# EAGLE board 8x8_328 (EAGLE 6.6.0)
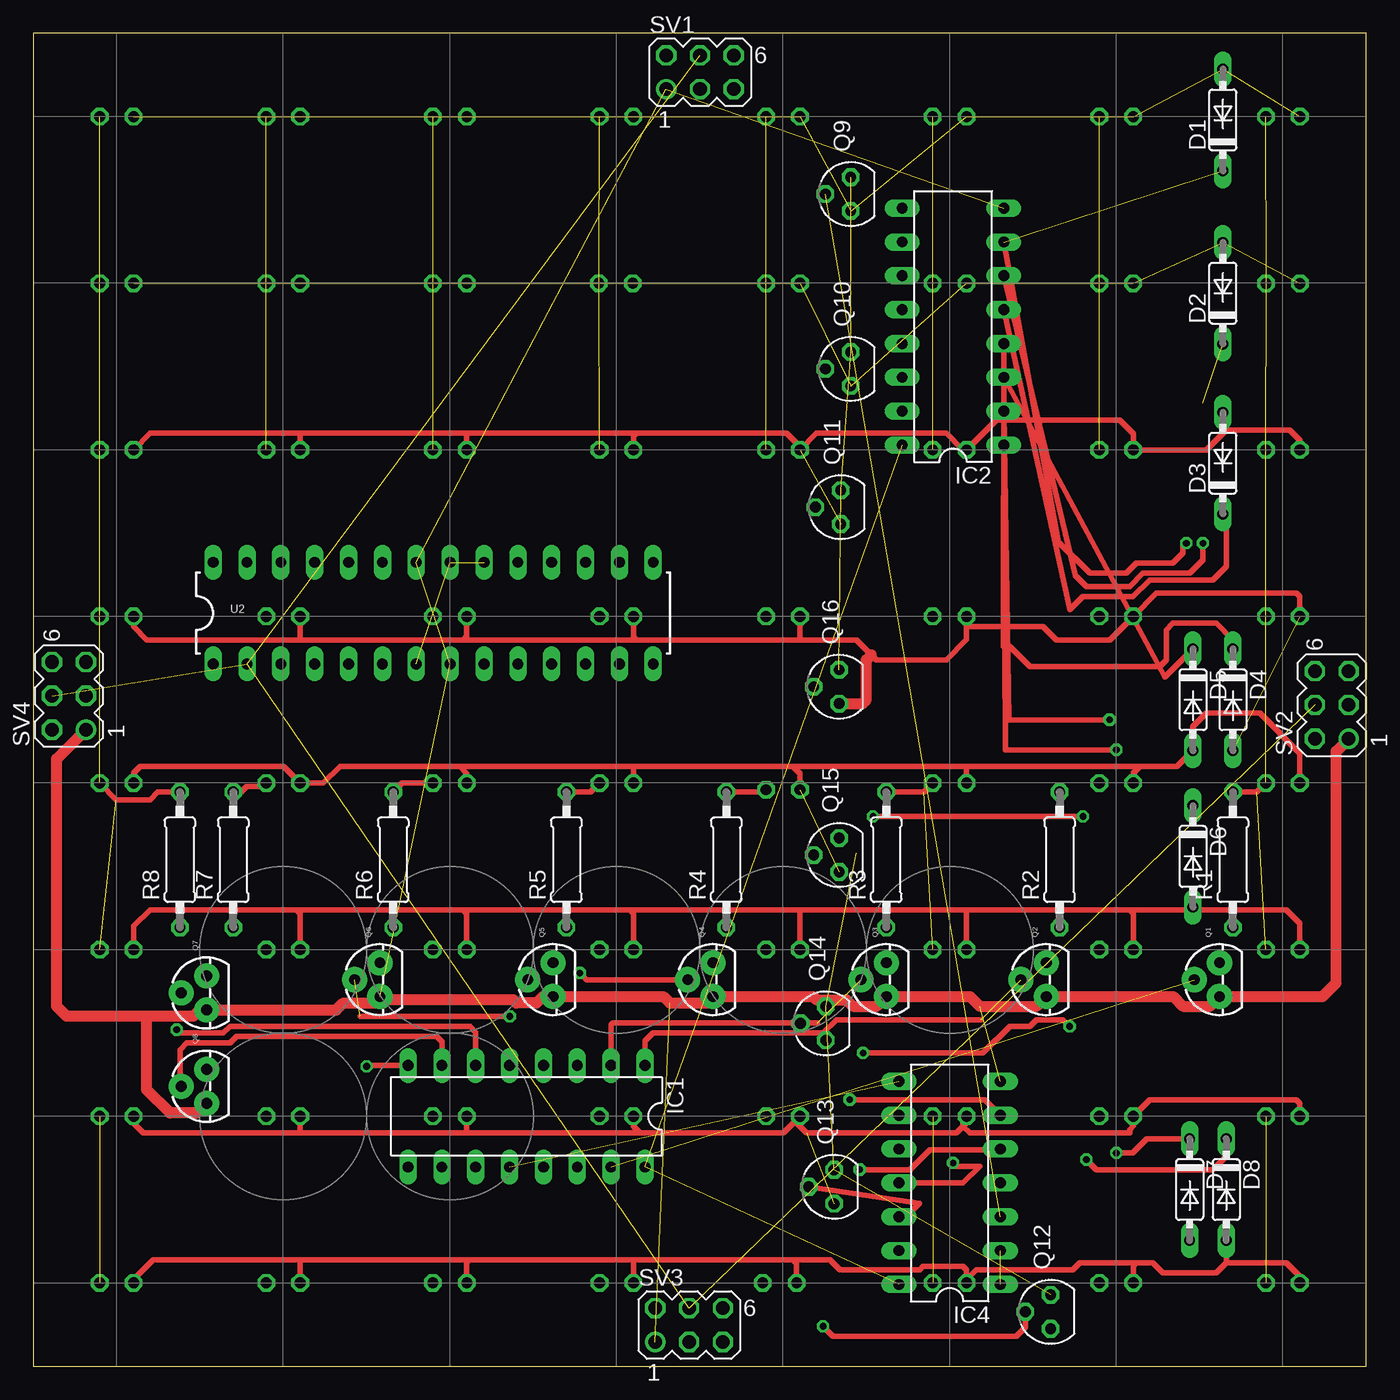
[diagram p0: board, top side]
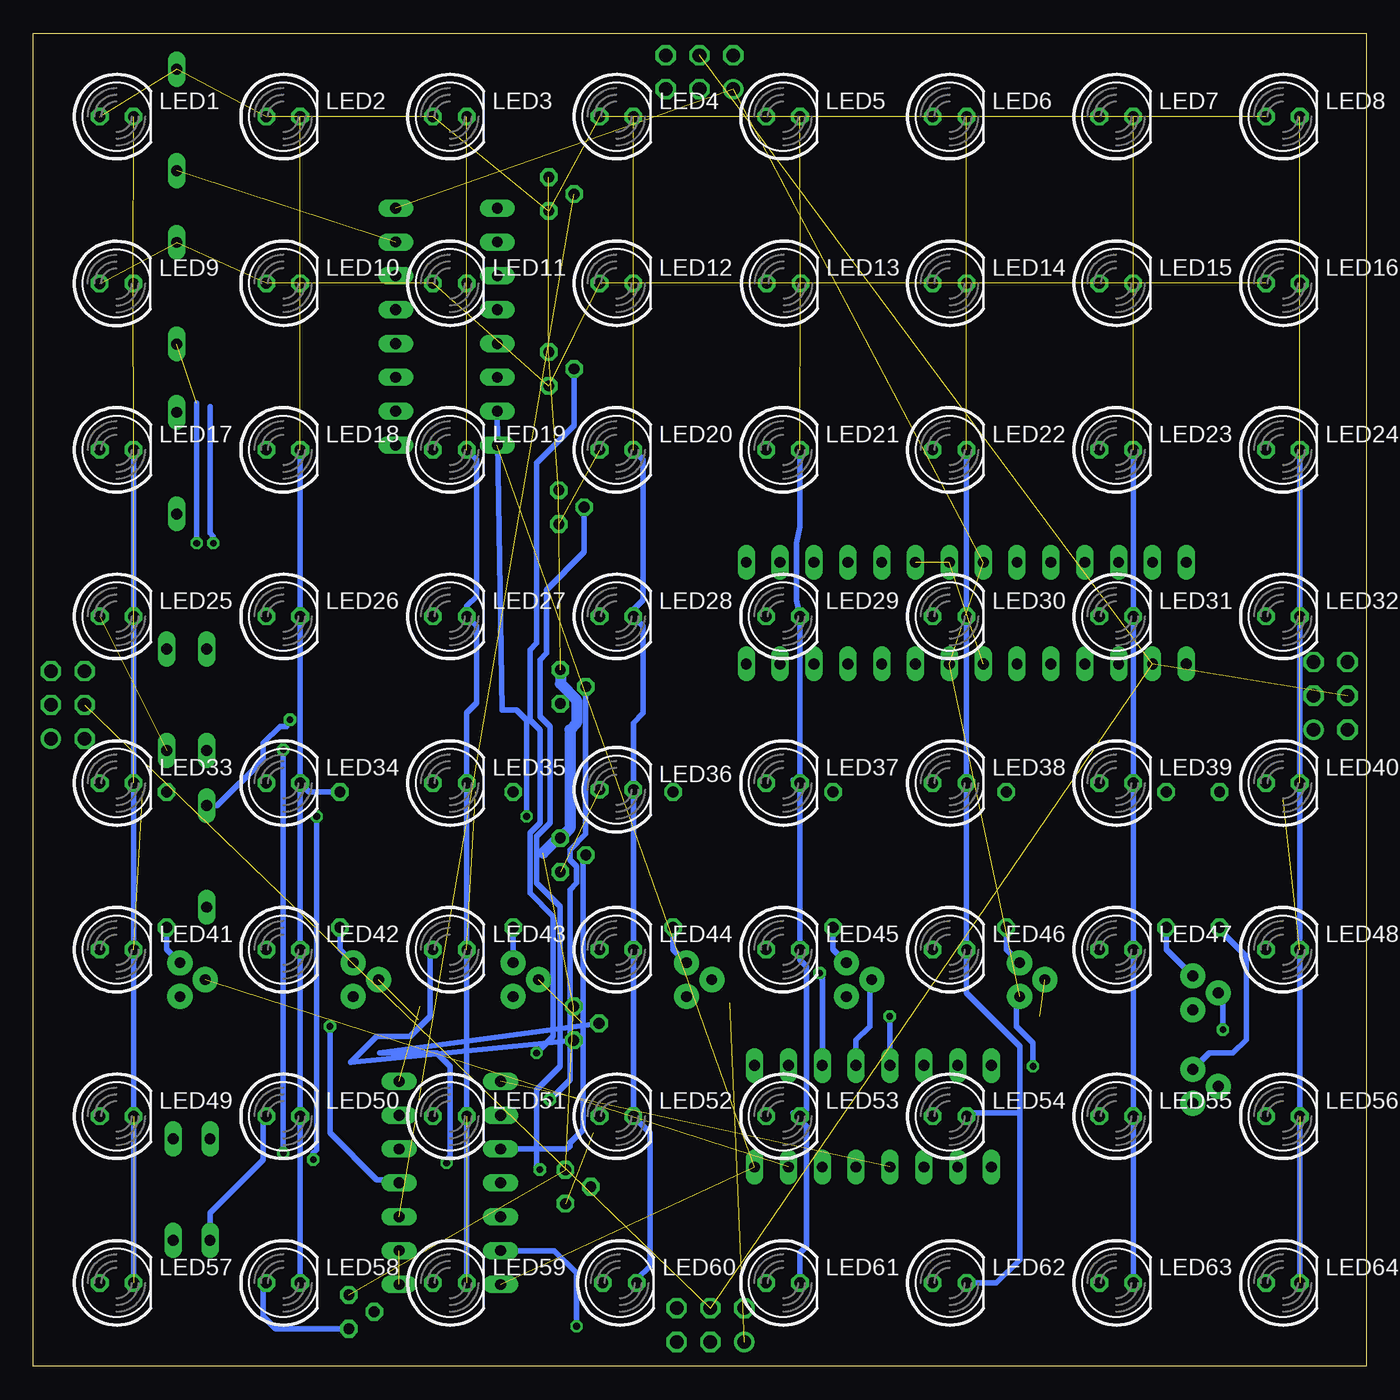
[diagram p1: board, bottom side, seen from below]

Size 100 x 100 mm. Coordinates in mm from the lower left corner, seen from the top.
Outline: 0,0 100,0 100,100 0,100 0,0
Copper layers (1*16): Top 0.035mm / dielectric 1.5mm / Bottom 0.035mm
Design rules "default": minimum track width 10mil, minimum drill 24mil, track to track 8mil, track to pad 8mil, pad to pad 8mil, via to via 8mil, smd to smd 8mil, copper to edge 40mil, drill to drill 8mil, minimum pad ring 10mil, minimum via ring 8mil, stop-mask expansion 4mil, vias tented up to drill 0mil, thermal gap 10mil

## Footprints (pad centres in the part's own frame; a part is rotated, then mirrored left to right if it is on the bottom)
DO35-7 = drill 0.813 long: A 3.81,0; C -3.81,0
DIL16 = drill 0.813 long: 1 -8.89,-3.81; 2 -6.35,-3.81; 3 -3.81,-3.81; 4 -1.27,-3.81; 5 1.27,-3.81; 6 3.81,-3.81; 7 6.35,-3.81; 8 8.89,-3.81; 9 8.89,3.81; 10 6.35,3.81; 11 3.81,3.81; 12 1.27,3.81; 13 -1.27,3.81; 14 -3.81,3.81; 15 -6.35,3.81; 16 -8.89,3.81
DIL14 = drill 0.813 long: 1 -7.62,-3.81; 2 -5.08,-3.81; 3 -2.54,-3.81; 4 0,-3.81; 5 2.54,-3.81; 6 5.08,-3.81; 7 7.62,-3.81; 8 7.62,3.81; 9 5.08,3.81; 10 2.54,3.81; 11 0,3.81; 12 -2.54,3.81; 13 -5.08,3.81; 14 -7.62,3.81
LED5MM = drill 0.813 octagon: A -1.27,0; K 1.27,0
TO-92 = drill 0.813 pad 1.88: 1 -1.27,0; 2 0,1.905; 3 1.27,0
SOT54E = drill 0.813 octagon: D -1.27,0; G 0,1.905; S 1.27,0
0207/10 = drill 0.813 octagon: 1 -5.08,0; 2 5.08,0
MA03-2 = drill 1.016: 1 -2.54,-1.27 | drill 1.016 octagon: 2 -2.54,1.27; 3 0,-1.27; 4 0,1.27; 5 2.54,-1.27; 6 2.54,1.27
DIL28-3 = drill 0.813 long: 1 -16.51,-3.81; 2 -13.97,-3.81; 3 -11.43,-3.81; 4 -8.89,-3.81; 5 -6.35,-3.81; 6 -3.81,-3.81; 7 -1.27,-3.81; 8 1.27,-3.81; 9 3.81,-3.81; 10 6.35,-3.81; 11 8.89,-3.81; 12 11.43,-3.81; 13 13.97,-3.81; 14 16.51,-3.81; 15 16.51,3.81; 16 13.97,3.81; 17 11.43,3.81; 18 8.89,3.81; 19 6.35,3.81; 20 3.81,3.81; 21 1.27,3.81; 22 -1.27,3.81; 23 -3.81,3.81; 24 -6.35,3.81; 25 -8.89,3.81; 26 -11.43,3.81; 27 -13.97,3.81; 28 -16.51,3.81

## Placement (x,y rotation side)
D1  1N4148DO35-7  [DO35-7]  89.25,93.5 90 top
D2  1N4148DO35-7  [DO35-7]  89.25,80.5 90 top
D3  1N4148DO35-7  [DO35-7]  89.25,67.75 90 top
D4  1N4148DO35-7  [DO35-7]  90,50 270 top
D5  1N4148DO35-7  [DO35-7]  87,50 270 top
D6  1N4148DO35-7  [DO35-7]  87,38.25 270 top
D7  1N4148DO35-7  [DO35-7]  86.75,13.25 270 top
D8  1N4148DO35-7  [DO35-7]  89.5,13.25 270 top
IC1  74HC595N  [DIL16]  37,18.75 180 top
IC2  74HC595N  [DIL16]  69,78 90 top
IC4  74AC164N  [DIL14]  68.75,13.75 90 top
LED1  [LED5MM]  93.75,93.75 0 bottom
LED2  [LED5MM]  81.25,93.75 0 bottom
LED3  [LED5MM]  68.75,93.75 0 bottom
LED4  [LED5MM]  56.25,93.75 0 bottom
LED5  [LED5MM]  43.75,93.75 0 bottom
LED6  [LED5MM]  31.25,93.75 0 bottom
LED7  [LED5MM]  18.75,93.75 0 bottom
LED8  [LED5MM]  6.25,93.75 0 bottom
LED9  [LED5MM]  93.76,81.23 0 bottom
LED10  [LED5MM]  81.25,81.25 0 bottom
LED11  [LED5MM]  68.75,81.25 0 bottom
LED12  [LED5MM]  56.25,81.25 0 bottom
LED13  [LED5MM]  43.7,81.25 0 bottom
LED14  [LED5MM]  31.25,81.25 0 bottom
LED15  [LED5MM]  18.75,81.25 0 bottom
LED16  [LED5MM]  6.25,81.25 0 bottom
LED17  [LED5MM]  93.75,68.75 0 bottom
LED18  [LED5MM]  81.25,68.75 0 bottom
LED19  [LED5MM]  68.75,68.75 0 bottom
LED20  [LED5MM]  56.25,68.75 0 bottom
LED21  [LED5MM]  43.75,68.75 0 bottom
LED22  [LED5MM]  31.25,68.75 0 bottom
LED23  [LED5MM]  18.75,68.75 0 bottom
LED24  [LED5MM]  6.25,68.75 0 bottom
LED25  [LED5MM]  93.75,56.25 0 bottom
LED26  [LED5MM]  81.25,56.25 0 bottom
LED27  [LED5MM]  68.75,56.25 0 bottom
LED28  [LED5MM]  56.25,56.25 0 bottom
LED29  [LED5MM]  43.75,56.25 0 bottom
LED30  [LED5MM]  31.25,56.25 0 bottom
LED31  [LED5MM]  18.75,56.25 0 bottom
LED32  [LED5MM]  6.25,56.25 0 bottom
LED33  [LED5MM]  93.75,43.75 0 bottom
LED34  [LED5MM]  81.25,43.75 0 bottom
LED35  [LED5MM]  68.75,43.75 0 bottom
LED36  [LED5MM]  56.25,43.25 0 bottom
LED37  [LED5MM]  43.75,43.75 0 bottom
LED38  [LED5MM]  31.25,43.75 0 bottom
LED39  [LED5MM]  18.75,43.75 0 bottom
LED40  [LED5MM]  6.25,43.75 0 bottom
LED41  [LED5MM]  93.75,31.25 0 bottom
LED42  [LED5MM]  81.25,31.25 0 bottom
LED43  [LED5MM]  68.75,31.25 0 bottom
LED44  [LED5MM]  56.25,31.25 0 bottom
LED45  [LED5MM]  43.75,31.25 0 bottom
LED46  [LED5MM]  31.25,31.25 0 bottom
LED47  [LED5MM]  18.75,31.25 0 bottom
LED48  [LED5MM]  6.25,31.25 0 bottom
LED49  [LED5MM]  93.75,18.75 0 bottom
LED50  [LED5MM]  81.25,18.75 0 bottom
LED51  [LED5MM]  68.75,18.75 0 bottom
LED52  [LED5MM]  56.25,18.75 0 bottom
LED53  [LED5MM]  43.75,18.75 0 bottom
LED54  [LED5MM]  31.25,18.75 0 bottom
LED55  [LED5MM]  18.75,18.75 0 bottom
LED56  [LED5MM]  6.25,18.75 0 bottom
LED57  [LED5MM]  93.75,6.25 0 bottom
LED58  [LED5MM]  81.25,6.25 0 bottom
LED59  [LED5MM]  68.75,6.25 0 bottom
LED60  [LED5MM]  56,6.25 0 bottom
LED61  [LED5MM]  43.75,6.25 0 bottom
LED62  [LED5MM]  31.25,6.25 0 bottom
LED63  [LED5MM]  18.75,6.25 0 bottom
LED64  [LED5MM]  6.25,6.25 0 bottom
Q1  MOSFET-NCHANNEL2N7000  [TO-92]  89,29 90 top
Q2  MOSFET-NCHANNEL2N7000  [TO-92]  76,29 90 top
Q3  MOSFET-NCHANNEL2N7000  [TO-92]  64,29 90 top
Q4  MOSFET-NCHANNEL2N7000  [TO-92]  51,29 90 top
Q5  MOSFET-NCHANNEL2N7000  [TO-92]  39,29 90 top
Q6  MOSFET-NCHANNEL2N7000  [TO-92]  26,29 90 top
Q7  MOSFET-NCHANNEL2N7000  [TO-92]  13,28 90 top
Q8  MOSFET-NCHANNEL2N7000  [TO-92]  13,21 90 top
Q9  BS250  [SOT54E]  61.33,87.94 90 top
Q10  BS250  [SOT54E]  61.33,74.82 90 top
Q11  BS250  [SOT54E]  60.58,64.45 90 top
Q12  BS250  [SOT54E]  76.33,4.08 90 top
Q13  BS250  [SOT54E]  60.08,13.46 90 top
Q14  BS250  [SOT54E]  59.46,25.72 90 top
Q15  BS250  [SOT54E]  60.46,38.35 90 top
Q16  BS250  [SOT54E]  60.46,50.98 90 top
R1  [0207/10]  90,38 90 top
R2  [0207/10]  77,38 90 top
R3  [0207/10]  64,38 90 top
R4  [0207/10]  52,38 90 top
R5  [0207/10]  40,38 90 top
R6  [0207/10]  27,38 90 top
R7  [0207/10]  15,38 90 top
R8  [0207/10]  11,38 90 top
SV1  [MA03-2]  50.02,97.08 0 top
SV2  [MA03-2]  97.42,49.61 90 top
SV3  [MA03-2]  49.2,3.08 0 top
SV4  [MA03-2]  2.67,50.29 90 top
U2  ATMEGA328P_PDIP  [DIL28-3]  30,56.5 0 top

## Library data of the parts
D1-D8 = diode
IC1 IC2 IC4 = 74xx-eu
LED1-LED64 = dtb
Q1-Q8 = SparkFun-DiscreteSemi
Q9-Q16 = transistor-small-signal
R1-R8 = resistor
SV1-SV4 = con-lstb; OC_FARNELL: unknown; OC_NEWARK: unknown
U2 = SparkFun-DigitalIC

## Nets
CFET1: IC1.15 Q1.2
CFET2: IC1.1 Q2.2
CFET3: IC1.2 Q3.2
CFET4: IC1.3 Q4.2
CFET5: IC1.4 Q5.2
CFET6: IC1.5 Q6.2
CFET7: IC1.6 Q7.2
CFET8: IC1.7 Q8.2
COL1: LED1.K LED9.K LED17.K LED25.K LED33.K LED41.K LED49.K LED57.K R1.2
COL2: LED2.K LED10.K LED18.K LED26.K LED34.K LED42.K LED50.K LED58.K R2.2
COL3: LED3.K LED11.K LED19.K LED27.K LED35.K LED43.K LED51.K LED59.K R3.2
COL4: LED4.K LED12.K LED20.K LED28.K LED36.K LED44.K LED52.K LED60.K R4.2
COL5: LED5.K LED13.K LED21.K LED29.K LED37.K LED45.K LED53.K LED61.K R5.2
COL6: LED6.K LED14.K LED22.K LED30.K LED38.K LED46.K LED54.K LED62.K R6.2
COL7: LED7.K LED15.K LED23.K LED31.K LED39.K LED47.K LED55.K LED63.K R7.2
COL8: LED8.K LED16.K LED24.K LED32.K LED40.K LED48.K LED56.K LED64.K R8.2
COMMS_DOWN: SV3.3
COMMS_LEFT: SV4.3
COMMS_RIGHT: SV2.3
COMMS_UP: SV1.3
G_UART: SV1.4 SV2.4 SV3.4 SV4.4 U2.2
GND: IC1.8 IC2.8 IC4.7 Q1.1 Q2.1 Q3.1 Q4.1 Q5.1 Q6.1 Q7.1 Q8.1 SV1.1 SV2.1 SV3.1 SV4.1 U2.8 U2.22
N$1: Q8.3 R8.1
N$2: Q7.3 R7.1
N$3: Q6.3 R6.1
N$4: Q5.3 R5.1
N$5: Q4.3 R4.1
N$6: Q3.3 R3.1
N$7: Q2.3 R2.1
N$8: Q1.3 R1.1
N$9: IC1.12 IC4.8
N$10: IC4.1 IC4.2
N$11: IC2.14
N$12: IC2.11
N$13: IC1.14
N$14: D1.C IC2.7
N$15: IC1.11
N$16: U2.7 U2.20 U2.21
N$20: D8.C IC2.15
N$21: D7.C IC2.1
N$22: D6.C IC2.2
N$23: D5.C IC2.3
N$24: D4.C IC2.4
N$25: D3.C IC2.5
N$26: D2.C IC2.6
N$29: Q9.S Q10.S Q11.S Q12.S Q13.S Q14.S Q15.S Q16.S
RFET1: IC4.3 Q9.G
RFET2: IC4.4 Q10.G
RFET3: IC4.5 Q11.G
RFET4: IC4.6 Q16.G
RFET5: IC4.10 Q15.G
RFET6: IC4.11 Q14.G
RFET7: IC4.12 Q13.G
RFET8: IC4.13 Q12.G
ROW1: D1.A LED1.A LED2.A LED3.A LED4.A LED5.A LED6.A LED7.A LED8.A Q9.D
ROW2: D2.A LED9.A LED10.A LED11.A LED12.A LED13.A LED14.A LED15.A LED16.A Q10.D
ROW3: D3.A LED17.A LED18.A LED19.A LED20.A LED21.A LED22.A LED23.A LED24.A Q11.D
ROW4: D4.A LED25.A LED26.A LED27.A LED28.A LED29.A LED30.A LED31.A LED32.A Q16.D
ROW5: D5.A LED33.A LED34.A LED35.A LED36.A LED37.A LED38.A LED39.A LED40.A Q15.D
ROW6: D6.A LED41.A LED42.A LED43.A LED44.A LED45.A LED46.A LED47.A LED48.A Q14.D
ROW7: D7.A LED49.A LED50.A LED51.A LED52.A LED53.A LED54.A LED55.A LED56.A Q13.D
ROW8: D8.A LED57.A LED58.A LED59.A LED60.A LED61.A LED62.A LED63.A LED64.A Q12.D
SHIFT_LEFT: SV4.5
SHIFT_RIGHT: SV2.5
VCC: IC1.16 IC2.16 IC4.14

## Tracks (layer width: path | path; a pad name or v marks a point on that pad's centre or on a via)
CFET1  (1 unrouted)
CFET2  (1 unrouted)
  Top 0.406: IC1.1 45.89,24.39 46.5,25 59.25,25 60.25,26 71.09,26
CFET3  (1 unrouted)
  Top 0.406: IC1.2 43.35,25.6 43.5,25.75 58.84,25.75
CFET4  (via drill 0.5)
  Top 0.406: Q4.2 41.5,29 v41,29.5
  Bottom 0.406: IC1.3 40.81,29 | 40.81,29 40.81,29.31 v41,29.5 41,29.19 40.81,29
CFET5
  Bottom 0.406: IC1.4 38.27,24.48 37.25,25.5 37.25,28.84 Q5.2
CFET6  (via drill 0.5)  (1 unrouted)
  Top 0.406: 24.5,26.25 v35.75,26.25
  Bottom 0.406: v35.75,26.25 35.75,22.58 IC1.5
CFET7  (via drill 0.5)
  Top 0.406: IC1.6 33.19,25.06 32.75,25.5 14.75,25.5 14.25,25 11,25 v10.75,25.25
  Bottom 0.406: v10.75,25.25 10.75,27.66 Q7.2
CFET8
  Top 0.406: IC1.7 30.65,24.35 30.25,24.75 15.25,24.75 14.75,24.25 11.5,24.25 11,23.75 11,21.09 Q8.2
COL1  (6 unrouted)
  Top 0.406: R1.2 91.81,43.08 LED33.K
  Bottom 0.406: LED57.K LED17.K
COL2  (2 unrouted)
  Bottom 0.406: LED18.K LED26.K LED34.K | LED34.K LED42.K | LED58.K LED50.K LED42.K | R2.2 79.31,43.08 LED34.K | LED34.K 79.98,43.98 80,44 80,31.27 LED42.K
COL3  (4 unrouted)
  Top 0.406: R3.2 66.81,43.08 LED35.K
  Bottom 0.406: LED59.K LED35.K 67.48,49.02 66.75,49.75 66.75,55.52 LED27.K 67.48,57.02 66.75,57.75 66.75,68.02 LED19.K
COL4  (2 unrouted)
  Top 0.406: R4.2 54.81,43.08 LED36.K
  Bottom 0.406: LED60.K 54.73,6.52 53.75,7.5 53.75,17.52 LED52.K LED44.K LED36.K 54.98,48.27 54.25,49 54.25,55.52 LED28.K 54.98,56.77 54.25,57.5 54.25,68.02 LED20.K
COL5  (2 unrouted)
  Top 0.406: R5.2 41.81,43.08 LED37.K
  Bottom 0.406: LED61.K 42.48,8.52 42,9 42,18 43,19 42.73,19 LED53.K 42,19.23 42,30 42.48,30.48 LED45.K LED37.K | LED37.K 42.75,43.75 43,44 | LED21.K 42.48,62.98 42.75,61.75 42.75,57.48 LED29.K 42.5,55.02 42.5,49.25 42.48,48.02 LED37.K
COL6  (2 unrouted)
  Top 0.406: LED38.K 27.67,43.75 R6.2
  Bottom 0.406: LED22.K LED30.K LED38.K LED46.K | LED46.K 29.98,31.02 30,31 | 30,31 30,31.23 LED46.K | 30,31 30,28 26,24 26,19 | 26,19 29.73,19 LED54.K | LED62.K 27.75,6.25 26,8 26,19
COL7  (2 unrouted)
  Top 0.406: R7.2 15.58,43.08 16,43.5 17.23,43.5 LED39.K
  Bottom 0.406: LED63.K LED55.K LED47.K LED39.K LED31.K LED23.K
COL8  (6 unrouted)
  Top 0.406: R8.2 9.33,43.08 8.75,42.5 6.23,42.5 LED40.K
  Bottom 0.406: LED64.K LED24.K
G_UART  (4 unrouted)
GND  (via drill 0.5)  (6 unrouted)
  Top 0.406: IC1.8 25.06,22.56 v25,22.5
  Top 0.813: SV2.1 97.75,46.13 97.75,28.75 96.73,27.73 Q1.1 88.27,27 86.25,27 85.52,27.73 Q2.1 75.27,27 71,27 70.27,27.73 Q3.1 63.27,27 61.5,27 61,27.5 58.75,27.5 58.52,27.73 Q4.1 50.52,27.25 47.75,27.25 47.27,27.73 Q5.1 38.23,27.73 37.75,27.25 36.25,27.25 36,27.5 26.23,27.5 Q6.1 26.25,27.48 26.25,27.25 23.25,27.25 22.73,26.73 Q7.1 12.48,26.73 12,26.25 8.5,26.25 | 8.5,26.25 2.5,26.25 1.75,27 1.75,45.56 SV4.1 | Q8.1 12.98,19.73 12.25,19 10.25,19 8.5,20.75 8.5,26.25
  Bottom 0.406: v25,22.5 25,24.25 26.25,25.5 26.25,27.48 Q6.1
N$1
  Bottom 0.406: R8.1 11,32.75 9,30.75 9,24.5 10,23.5 11.77,23.5 Q8.3
N$2
  Bottom 0.406: R7.1 15,31.27 Q7.3
N$3
  Bottom 0.406: R6.1 27,31.27 Q6.3
N$4
  Bottom 0.406: R5.1 40,31.27 Q5.3
N$5
  Bottom 0.406: R4.1 52,31.27 Q4.3
N$6
  Bottom 0.406: R3.1 Q3.3
N$7
  Bottom 0.406: R2.1 77,31.27 Q2.3
N$8
  Bottom 0.406: R1.1 90,31.27 Q1.3
N$9  (1 unrouted)
N$10  (1 unrouted)
N$14  (via drill 0.5)  (1 unrouted)
  Top 0.406: IC2.7 76.9,61.85 79.25,59.5 82,59.5 82.75,60.25 85.5,60.25 86.25,61 86.25,61.5 v86.5,61.75
  Bottom 0.406: v86.5,61.75 86.5,62.25 86.75,62.5 86.75,72
N$16  (2 unrouted)
N$20  (via drill 0.5)
  Top 0.406: D8.C 89.5,15.75 88.5,14.75 79.75,14.75 v79,15.5 | v78.75,41.25 v63,41.25
  Bottom 0.406: v79,15.5 79,16 78.75,16.25 v78.75,41.25 | v63,41.25 63,48.5 63.75,49.25 64.84,49.25 IC2.15
N$21  (via drill 0.5)
  Top 0.406: D7.C 83.56,17.06 82.5,16 v81.25,16 | v81.25,46.25 72.92,46.25 IC2.1
  Bottom 0.406: v81.25,16 v81.25,46.25
N$22  (via drill 0.5)
  Top 0.406: v80.75,48.5 73.21,48.5 IC2.2
  Bottom 0.406: D6.C 86.19,42.06 82.75,45.5 82.75,46.75 81.5,48 81,48 81,48.25 v80.75,48.5
N$23
  Top 0.406: IC2.3 84.88,51.69 D5.C
N$24
  Top 0.406: D4.C 90,54.5 88.75,55.75 85.5,55.75 85,55.25 85,53 84.5,52.5 74.75,52.5 73.25,54 72.79,54 IC2.4
N$25
  Top 0.406: IC2.5 77.77,56.77 78.75,57.75 82.5,57.75 83.75,59 88.5,59 89.5,60 89.5,63.69 D3.C
N$26  (via drill 0.5)  (1 unrouted)
  Top 0.406: IC2.6 78.19,59.31 79,58.5 82.25,58.5 83.25,59.5 86.75,59.5 87.75,60.5 v87.75,61.75
  Bottom 0.406: v87.75,61.75 87.75,72.25
N$29  (6 unrouted)
  Bottom 0.813: Q16.S 60.46,51.21 59.25,50 59.25,48.25 59.75,47.75 59.75,40.33 Q15.S 60.63,39.62 61.75,38.5
RFET1  (1 unrouted)
RFET2  (via drill 0.5)
  Top 0.406: v62.25,23.5 71.25,23.5 73.25,25.5 74.75,25.5 75.25,26 77.25,26 v77.75,25.5
  Bottom 0.406: Q10.G 59.42,70.58 62.25,67.75 62.25,54.25 62.75,53.75 62.75,48.5 62,47.75 62,40.75 62.75,40 62.75,35.5 61,33.75 61,24.75 v62.25,23.5 | v77.75,25.5 77.75,17.5 74.25,14 72.81,14 IC4.4
RFET3  (via drill 0.5)
  Top 0.406: v62,14.75 65.75,14.75 67.25,16.25 72.52,16.25 IC4.5
  Bottom 0.406: Q11.G 58.67,61.08 61.5,58.25 61.5,53.5 62,53 62,48.75 61.25,48 61.25,40.75 62.25,39.75 62.25,36.25 60.5,34.5 60.5,22.5 62.25,20.75 62.25,15 v62,14.75
RFET4  (via drill 0.5)
  Top 0.406: v61.25,20 71.39,20 IC4.6
  Bottom 0.406: Q16.G 58.55,39.95 59.75,38.75 59.75,38 59.25,37.5 59.25,36.25 59.75,35.75 59.75,21.5 v61.25,20
RFET5
  Bottom 0.406: IC4.10 59.96,16.29 59.75,16.5 59.75,16.75 58.75,17.75 58.75,38.16 Q15.G
RFET6  (via drill 0.5)
  Top 0.406: IC4.11 69.75,13.75 71,15 69.25,15 v69,15.25
  Bottom 0.406: v69,15.25 69,15.5 68.75,15.75 68.75,22.5 69.75,23.5 74.03,23.5 Q14.G
RFET7
  Top 0.406: Q13.G 66.48,12.21 65.48,11.21 IC4.12
RFET8  (via drill 0.5)
  Top 0.406: Q12.G 74.42,2.92 73.75,2.25 60,2.25 v59.25,3
  Bottom 0.406: IC4.13 60.92,8.67 59.25,7 v59.25,3
ROW1  (9 unrouted)
ROW2  (9 unrouted)
ROW3  (1 unrouted)
  Top 0.406: LED17.A 95.02,69.48 94.25,70.25 89.5,70.25 | 89.5,70.25 88,68.75 LED18.A 82.52,69.98 81.5,71 72.27,71 LED19.A 69.75,68.75 68.5,70 58.77,70 LED20.A 57.52,68.98 56.5,70 45.25,70 | 45.25,70 32.5,70 | 32.5,70 20,70 | 20,70 8.77,70 LED24.A | LED23.A 20.02,69.98 20,70 | LED22.A 32.52,69.98 32.5,70 | LED21.A 45.02,69.77 45.25,70 | D3.A 89.25,70.5 89.5,70.25
ROW4  (1 unrouted)
  Top 0.406: LED32.A 7.52,55.48 8.5,54.5 20,54.5 | 20,54.5 32.25,54.5 | 32.25,54.5 45.25,54.5 | 45.25,54.5 57.5,54.5 | LED27.A 70.02,55.75 | LED28.A 57.52,54.52 57.5,54.5 | LED29.A 45.02,54.73 45.25,54.5 | LED30.A 32.52,54.77 32.25,54.5 | LED25.A 95.02,57.73 94.75,58 84.27,58 LED26.A 80.77,54.5 76.75,54.5 75.75,55.5 70.27,55.5 70.02,55.75 | LED31.A 20.02,54.52 20,54.5 | 57.5,54.5 61.75,54.5 62.88,53.38 63.25,53 68.5,53 70.02,54.52 70.02,55.75
  Top 0.813: Q16.D 62.21,49.71 62.5,50 62.5,53 62.88,53.38
ROW5  (1 unrouted)
  Top 0.406: LED40.A 7.52,44.52 8,45 18.77,45 LED39.A 21.75,43.75 23,45 32,45 | 32,45 45,45 | 45,45 57,45 | 57,45 70,45 | 70,45 83,45 | 83,45 85.81,45 D5.A 87,48 88,49 92,49 95.02,45.98 LED33.A | LED34.A 82.52,44.52 83,45 | LED35.A 70.02,44.98 70,45 | LED36.A 57.52,44.48 57,45 | LED37.A 45.02,44.98 45,45 | LED38.A 32.52,44.48 32,45
ROW6
  Top 0.406: LED48.A 7.52,33.02 8.75,34.25 19.75,34.25 | 19.75,34.25 32.25,34.25 | 32.25,34.25 44.75,34.25 | 44.75,34.25 57.5,34.25 | 57.5,34.25 70,34.25 | 70,34.25 82.25,34.25 | 82.25,34.25 86.81,34.25 D6.A 87.19,34.25 94,34.25 95.02,33.23 LED41.A | LED47.A 20.02,33.98 19.75,34.25 | LED46.A 32.52,33.98 32.25,34.25 | LED45.A 45.02,33.98 44.75,34.25 | LED44.A 57.52,34.23 57.5,34.25 | LED43.A 70.02,34.23 70,34.25 | LED42.A 82.52,33.98 82.25,34.25
  Bottom 0.406: Q14.D 76.21,22.79 74.25,24.75 71.75,24.75 70.25,26.25 70.25,31.02 LED43.A
ROW7  (1 unrouted)
  Top 0.406: LED56.A 7.52,18.23 8.25,17.5 20,17.5 | 20,17.5 32.5,17.5 | 32.5,17.5 45.5,17.5 | 45.5,17.5 56.27,17.5 57.13,18.36 | 57.13,18.36 LED52.A | LED49.A 95.02,19.73 94.75,20 83.77,20 LED50.A 82.52,18.02 82.25,17.75 82.25,17.5 70.25,17.5 69.75,18 69.75,18.48 LED51.A 70.02,18.27 69.25,17.5 58,17.5 57.13,18.36 | LED53.A 45.02,17.98 45.5,17.5 | LED54.A 32.52,17.52 32.5,17.5 | LED55.A 20.02,17.52 20,17.5
  Bottom 0.406: D7.A 86.75,11.5 82.75,15.5 82.75,18.52 LED50.A
ROW8
  Top 0.406: LED64.A 7.52,6.52 9,8 20,8 | 20,8 32.75,8 | 32.75,8 45,8 | 45,8 57,8 | 57,8 59.75,8 60.5,7.25 66.5,7.25 66.75,7.5 69.75,7.5 70,7.25 70,6.27 LED59.A 70.02,6.52 70.75,7.25 78,7.25 78.5,7.75 82.75,7.75 | 82.75,7.75 84,7.75 84.75,7 88.75,7 89.5,7.75 | 89.5,7.75 D8.A | LED57.A 95.02,6.73 94,7.75 89.5,7.75 | LED58.A 82.52,7.52 82.75,7.75 | LED60.A 57.27,7.73 57,8 | LED61.A 45.02,7.98 45,8 | LED62.A 32.52,7.77 32.75,8 | LED63.A 20.02,7.98 20,8
  Bottom 0.406: Q12.D 81.81,2.81 82.75,3.75 82.75,6.02 LED58.A
VCC  (2 unrouted)